# EAGLE board LoRa (EAGLE 9.6.2)
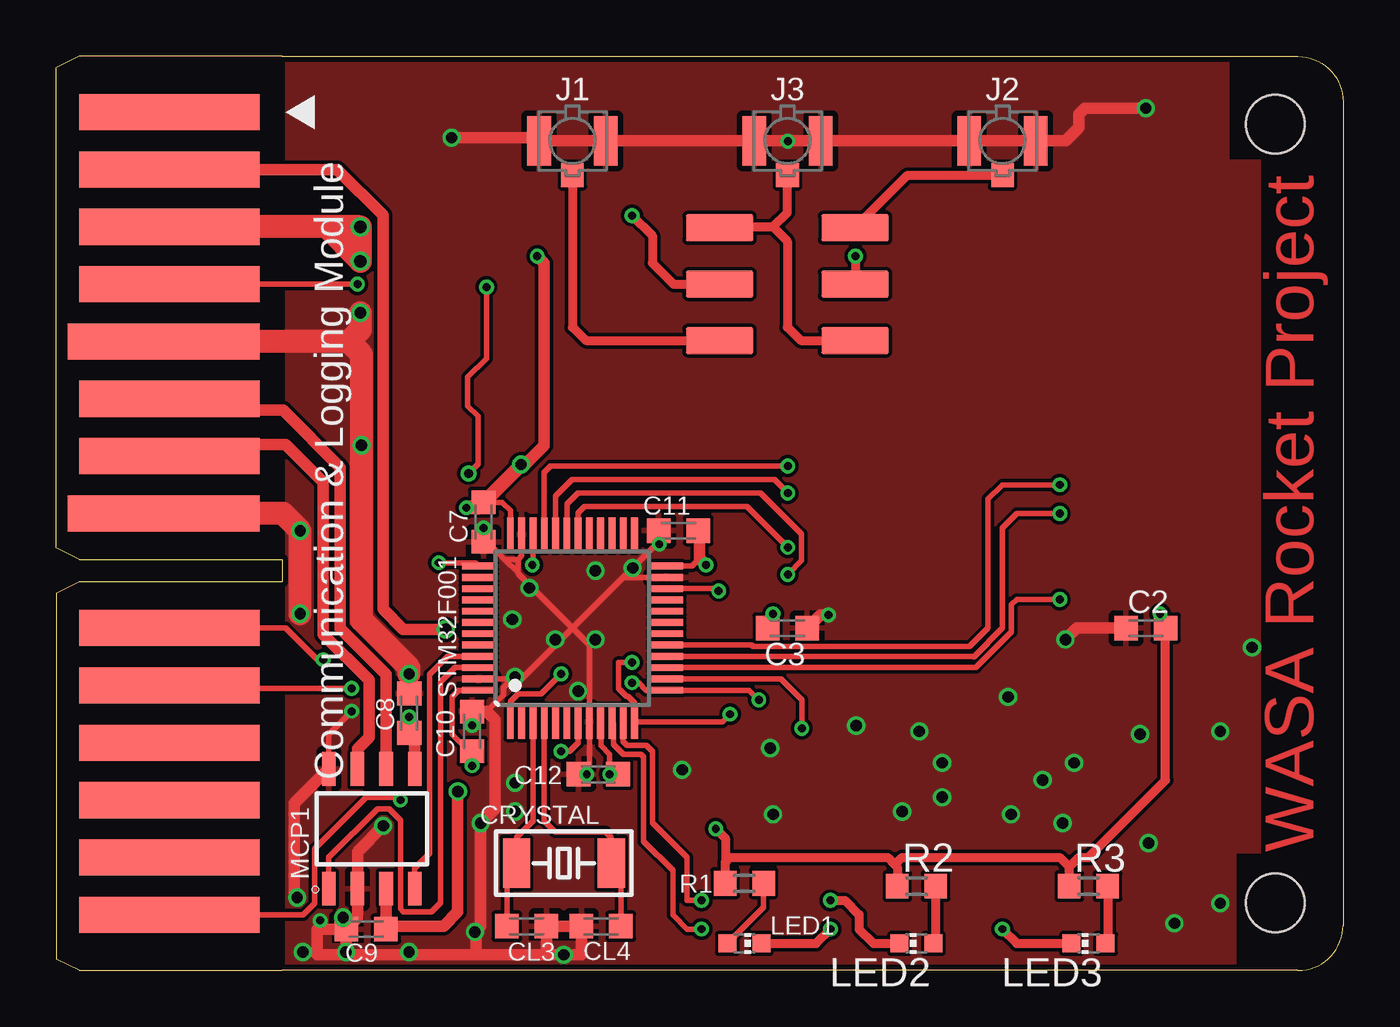
[diagram p0: board, top side]
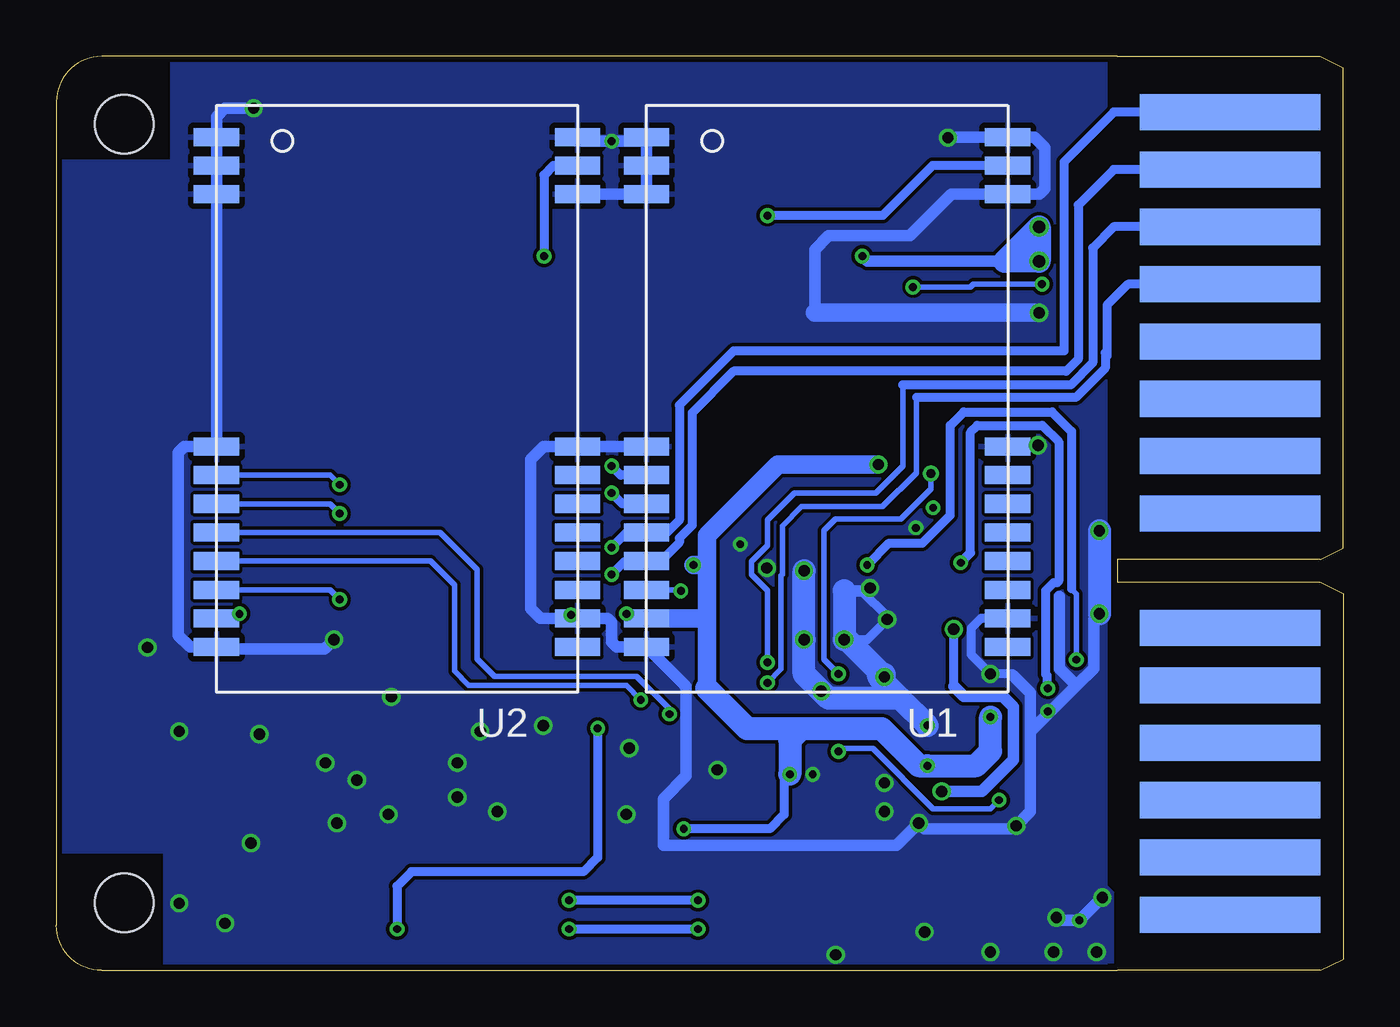
[diagram p1: board, bottom side, seen from below]

Size 57 x 40.5 mm. Coordinates in mm from the lower left corner, seen from the top.
Outline: 10,40.5 55,40.5 arc-90 57,38.5 57,2 arc-90 55,0 10,0
Copper layers (1*16): Top 0.035mm / dielectric 1.5mm / Bottom 0.035mm
Design rules "SeeedStudio_2layer_DRU_no_angle_20140221": minimum track width 6mil, minimum drill 12mil, track to track 6mil, track to pad 6mil, pad to pad 6mil, via to via 6mil, smd to smd 0mil, copper to edge 10mil, drill to drill 10mil, minimum pad ring 10mil, minimum via ring 6mil, stop-mask expansion 2mil, vias tented up to drill 100mil, thermal gap 10mil
Holes 2.6 mm at 54,3 54,37.5

## Footprints (pad centres in the part's own frame; a part is rotated, then mirrored left to right if it is on the bottom)
C0603K = smd 1.05 x 1.08: 1 -0.875,0; 2 0.875,0
FC-255 = smd 1.2 x 2.2: 1 -2.1,0; 2 2.1,0
U.FL_SMT = smd 1.05 x 2.2: GND1 -1.475,0; GND2 1.475,0 | smd 1 x 1.05: SIG 0,-1.525
CHIP-LED0603 = smd 0.8 x 0.8: A 0,-0.75; C 0,0.75
SOIC127P600X175-8N = smd 1.5 x 0.6: 1 -2.65,1.905; 2 -2.65,0.635; 3 -2.65,-0.635; 4 -2.65,-1.905; 5 2.65,-1.905; 6 2.65,-0.635; 7 2.65,0.635; 8 2.65,1.905
R0603 = smd 1 x 1.1: 1 -0.85,0; 2 0.85,0
LQFP48 = smd 1.5 x 0.3: 1 -4.15,2.75; 2 -4.15,2.25; 3 -4.15,1.75; 4 -4.15,1.25; 5 -4.15,0.75; 6 -4.15,0.25; 7 -4.15,-0.25; 8 -4.15,-0.75; 9 -4.15,-1.25; 10 -4.15,-1.75; 11 -4.15,-2.25; 12 -4.15,-2.75; 25 4.15,-2.75; 26 4.15,-2.25; 27 4.15,-1.75; 28 4.15,-1.25; 29 4.15,-0.75; 30 4.15,-0.25; 31 4.15,0.25; 32 4.15,0.75; 33 4.15,1.25; 34 4.15,1.75; 35 4.15,2.25; 36 4.15,2.75 | smd 0.3 x 1.5: 13 -2.75,-4.15; 14 -2.25,-4.15; 15 -1.75,-4.15; 16 -1.25,-4.15; 17 -0.75,-4.15; 18 -0.25,-4.15; 19 0.25,-4.15; 20 0.75,-4.15; 21 1.25,-4.15; 22 1.75,-4.15; 23 2.25,-4.15; 24 2.75,-4.15; 37 2.75,4.15; 38 2.25,4.15; 39 1.75,4.15; 40 1.25,4.15; 41 0.75,4.15; 42 0.25,4.15; 43 -0.25,4.15; 44 -0.75,4.15; 45 -1.25,4.15; 46 -1.75,4.15; 47 -2.25,4.15; 48 -2.75,4.15
E220-900T22S = smd 2 x 0.8: P1 8,-11.6; P2 8,-10.33; P3 8,-9.06; P4 8,2.11; P5 8,3.38; P6 8,4.65; P7 8,5.92; P8 8,7.19; P9 8,8.46; P10 8,9.73; P11 8,11; P12 -8,11; P13 -8,9.73; P14 -8,8.46; P15 -8,7.19; P16 -8,5.92; P17 -8,4.65; P18 -8,3.38; P19 -8,2.11; P20 -8,-9.06; P21 -8,-10.33; P22 -8,-11.6
EDGE30 = smd 1.6 x 8: 1 -17.78,-5; 2 -15.24,-5; 3 -12.7,-5; 4 -10.16,-5; 6 -5.08,-5; 7 -2.54,-5; 10 5.08,-5; 11 7.62,-5; 12 10.16,-5; 13 12.7,-5; 14 15.24,-5; 15 17.78,-5 | smd 1.6 x 8.5: 5 -7.62,-5.25; 8 0,-5.25 | smd 1.6 x 8 bottom: 16 -17.78,-5; 17 -15.24,-5; 18 -12.7,-5; 19 -10.16,-5; 20 -7.62,-5; 21 -5.08,-5; 22 -2.54,-5; 23 0,-5; 25 5.08,-5; 26 7.62,-5; 27 10.16,-5; 28 12.7,-5; 29 15.24,-5; 30 17.78,-5
IS-2245S-G = smd 1.2 x 3: 1 -2.5,3; 2 0,3; 3 2.5,3; 4 -2.5,-3; 5 0,-3; 6 2.5,-3

## Placement (x,y rotation side)
C2  0.1µF  [C0603K]  48.26,15.17 0 top
C3  0.1µF  [C0603K]  32.38,15.17 180 top
C7  [C0603K]  18.92,19.87 270 top
C8  [C0603K]  15.63,11.41 90 top
C9  [C0603K]  13.72,1.84 180 top
C10  [C0603K]  18.41,10.6 90 top
C11  [C0603K]  27.56,19.49 180 top
C12  0.1µF  [C0603K]  24,8.69 180 top
CL3  15pF  [C0603K]  20.83,1.96 180 top
CL4  15pF  [C0603K]  24.13,1.96 0 top
CRYSTAL  32.768kHz  [FC-255]  22.48,4.76 180 top
J1  U.FL-R-SMT  [U.FL_SMT]  22.86,36.76 0 top
J2  U.FL-R-SMT  [U.FL_SMT]  41.91,36.76 0 top
J3  U.FL-R-SMT  [U.FL_SMT]  32.38,36.76 0 top
LED1  [CHIP-LED0603]  30.48,1.2 270 top
LED2  [CHIP-LED0603]  38.1,1.2 90 top
LED3  [CHIP-LED0603]  45.72,1.2 90 top
MCP1  MCP2562-E/SN  [SOIC127P600X175-8N]  13.97,6.28 90 top
R1  470  [R0603]  30.48,3.87 0 top
R2  470  [R0603]  38.1,3.74 0 top
R3  470  [R0603]  45.72,3.74 0 top
STM32F001  STM32F072-LQFP48  [LQFP48]  22.86,15.17 90 top
U1  E220-900T22S  [E220-900T22S]  22.86,25.33 180 bottom
U2  E220-900T22S  [E220-900T22S]  41.91,25.33 180 bottom
U$2  EDGE30  [EDGE30]  10,20.25 270 top
U$4  IS-2245S-G  [IS-2245S-G]  32.38,30.41 90 top

## Library data of the parts
C2 C3 C7-C12 CL3 CL4 = rcl; SPICEPREFIX: C
CRYSTAL = crystal'
J1-J3 = connector; DIGIKEY: H122041-ND; MANUFACTURER: Hirose; MPN: U.FL-R-SMT-1(01)
LED1-LED3 = led
MCP1 = mcp2562-E_SN; AVAILABILITY: Unavailable; DESCRIPTION: Microchip MCP2562-E/SN, CAN Transceiver 1MBps 1-channel IEC 61000-4-2, 8-Pin SOIC; MF: Microchip; MP: MCP2562-E/SN; PACKAGE: SO-8 Microchip; PRICE: None
R1-R3 = rcl; SPICEPREFIX: R
STM32F001 = stm32f0
U1 U2 = lora
U$2 = bus
U$4 = FaBo-Switch

## Nets
CAN_RX: MCP1.4 STM32F001.45
CAN_TX: MCP1.1 STM32F001.46
CANH1: MCP1.7 U$2.7
CANL1: MCP1.6 U$2.6
GND: C2.1 C3.1 C7.2 C8.2 C9.2 C10.2 C11.2 C12.2 CL3.1 CL4.1 J1.GND1 J1.GND2 J2.GND1 J2.GND2 J3.GND1 J3.GND2 MCP1.2 MCP1.8 STM32F001.8 STM32F001.23 STM32F001.35 STM32F001.47 U1.P1 U1.P2 U1.P3 U1.P4 U1.P11 U1.P13 U1.P19 U1.P20 U1.P22 U2.P1 U2.P2 U2.P3 U2.P4 U2.P11 U2.P13 U2.P19 U2.P20 U2.P22 U$2.5 U$2.8
LORA1_AUX: STM32F001.22 U1.P9
LORA1_M0: STM32F001.33 U1.P5
LORA1_M1: STM32F001.32 U1.P6
LORA1_RTX: STM32F001.31 U1.P8 U$2.17
LORA1_TRX: STM32F001.30 U1.P7 U$2.16
LORA2_AUX: STM32F001.15 U2.P9
LORA2_M0: STM32F001.17 U2.P5
LORA2_M1: STM32F001.16 U2.P6
LORA2_RTX: STM32F001.13 U2.P8 U$2.19
LORA2_TRX: STM32F001.12 U2.P7 U$2.18
N$1: U1.P21 U$4.2
N$2: U2.P21 U$4.5
N$4: LED2.A R2.2
N$5: J1.SIG U$4.1
N$6: LED3.C STM32F001.14
N$7: J2.SIG U$4.6
N$8: J3.SIG U$4.3 U$4.4
N$9: LED3.A R3.2
N$10: LED1.C STM32F001.10
N$71: CL4.2 CRYSTAL.1 STM32F001.4
N$72: CL3.2 CRYSTAL.2 STM32F001.3
N$73: LED2.C STM32F001.11
N$76: LED1.A R1.2
NRST1: STM32F001.7 U$2.15
SWCLK1: STM32F001.37 U$2.11
SWDIO1: STM32F001.34 U$2.10
VBAT: STM32F001.1 U$2.4
VCC: C9.1 MCP1.3 U$2.2
VDD: C2.2 C3.2 C7.1 C8.1 C10.1 C11.1 C12.1 MCP1.5 R1.1 R2.1 R3.1 STM32F001.9 STM32F001.24 STM32F001.36 STM32F001.48 U1.P10 U2.P10 U$2.3
VPP: U$2.1

## Tracks (layer width: path | path; a pad name or v marks a point on that pad's centre or on a via)
CAN_RX
  Top 0.254: MCP1.4 15.88,4.52 16.54,5.18 16.54,13.13 17.33,13.92 STM32F001.45
CAN_TX
  Top 0.254: STM32F001.46 17.66,13.42 17.02,12.78 17.02,3 16.61,2.6 15.37,2.6 15.24,2.72 15.24,6.66 14.73,7.17 14.22,7.17 12.06,5.01 MCP1.1
CANH1
  Top 0.508: MCP1.7 13.34,9.82 13.84,10.33 13.84,12.87 11.81,14.9 11.81,21.65 10.16,23.3 5.51,23.3 U$2.7
CANL1
  Top 0.508: MCP1.6 14.61,13.12 12.57,15.15 12.57,22.28 10.03,24.82 5.51,24.82 U$2.6
GND  (via drill 0.35, 0.5)
  Top 0.254: STM32F001.35 20.61,18.38 20.45,18.22 | 20.45,17.63 20.45,18.22 | STM32F001.47 20.19,12.92 | 20.19,12.92 20.61,12.92 22.86,15.17 | 22.86,15.17 20.45,17.58 20.45,17.63 | 22.86,15.17 23.61,14.42 STM32F001.8 23.61,9.97 23.62,9.96 23.62,9.19 C12.2 | STM32F001.23 25.11,17.42 | 22.86,15.17 25.11,17.42 | 19.06,11.47 19.81,12.22 19.81,12.54 20.19,12.92 | C7.2 19.18,18.74 19.34,18.74 19.86,18.22 | 20.45,18.22 19.86,18.22 | 19.86,18.22 20.45,17.63 | 25.11,17.42 v25.53,17.84 26.68,18.99 C11.2 | MCP1.8 12.06,10.47 v13.08,11.49
  Top 0.508: C9.2 13.34,2.33 MCP1.2 13.34,5.26 v14.48,6.41 | 12.84,0.95 13.1,0.69 18.6,0.69 | C9.2 12.84,0.95 | v18.41,10.85 C10.2 19.06,11.47 19.43,11.11 19.43,7.17 v18.8,6.53 18.8,1.96 v18.54,1.71 18.6,1.65 18.6,0.69 | v15.62,13.14 v15.63,13.13 C8.2 | v18.92,19.61 C7.2 | C11.2 26.7,19.47 v26.7,18.89 | v22.48,0.69 23.25,0.69 CL4.1 CL3.1 21.7,0.69 v22.48,0.69 | v22.48,0.69 18.6,0.69 | C9.2 11.56,1.84 11.56,0.69 12.59,0.69 12.84,0.95 | MCP1.8 10.54,7.41 10.54,3.36 v10.67,3.23 | v44.7,14.66 45.21,15.17 C2.1 | v48.26,38.2 45.55,38.2 45.3,37.95 45.3,37.35 44.71,36.76 J2.GND2 J2.GND1 J3.GND2 | v17.51,36.9 21.25,36.9 J1.GND1 J1.GND2 J3.GND1 J3.GND2 | v32.4,36.75 v32.41,36.76 J3.GND2 | C3.1 33.84,15.75 v34.2,15.75
  Top 1.016: U$2.8 10.03,20.25 v10.79,19.49 v10.79,15.8 | 12.95,27.87 U$2.5 | v15.62,13.14 15.62,13.42 13.51,15.53 v13.51,23.27 13.51,27.31 12.95,27.87 | v13.46,29.14 13.46,28.38 12.95,27.87
  Bottom 0.406: v22.1,14.66 21.08,14.66 v20.19,15.55 20.19,15.68 21.34,16.82 | U1.P13 16.04,15.6 16.49,15.15 16.49,14 v15.62,13.14 14.67,13.14 14.64,13.11
  Bottom 0.508: 14.64,13.11 13.84,12.31 13.84,10.6 | 13.84,10.6 13.84,7.04 v14.48,6.41 14.61,6.28 18.54,6.28 v18.8,6.53 19.78,5.55 30.11,5.55 30.11,7.61 29.11,8.62 29.11,12.58 U1.P11 32.18,14.33 32.4,14.55 32.4,15.42 32.58,15.6 U2.P13 | 13.84,10.6 11.81,12.63 | 11.81,12.63 11.05,13.39 11.05,15.55 v10.79,15.8 | 20.95,16.82 21.34,16.82 22.1,16.82 | 11.81,12.63 12.57,13.39 12.57,16.57 | v12.7,2.34 12.57,2.22 v11.68,2.22 v10.67,3.23 | U1.P4 U2.P19 35.43,23.22 36,22.65 36,16.05 35.55,15.6 U2.P13 | v44.7,14.66 45.12,14.25 49.83,14.25 U2.P11 51.08,14.33 51.6,14.85 51.6,22.95 51.33,23.22 U2.P4 U2.P2 | v48.26,38.2 49.55,38.2 49.91,37.84 U2.P1 U2.P2 | v17.51,36.9 17.48,36.93 U1.P22 13.68,36.93 13.2,36.45 13.2,34.65 13.46,34.39 U1.P20 17.36,34.39 19.2,32.55 22.8,32.55 23.4,31.95 23.4,29.14 | U2.P20 U1.P3 U1.P1 | U1.P2 U1.P1 | U2.P3 U2.P2 | U1.P1 31.04,36.75 v32.4,36.75 33.73,36.75 U2.P22 | U2.P13 34.06,15.75 v34.2,15.75 | v13.51,23.27 13.56,23.22 U1.P19
  Bottom 0.813: v13.46,29.14 23.4,29.14
  Bottom 1.016: 19.62,12.06 20.57,13.01 20.57,13.14 20.32,13.14 v20.32,13.01 21.97,14.66 v22.1,14.66 22.1,16.82 | 19.62,12.06 v18.41,10.85 | v10.79,19.49 v10.79,15.8 | 19.62,12.06 22.8,12.06 v23.11,12.38 23.88,13.14 v23.88,14.66 v23.88,17.71
  other vias: 23.5,8.69 20.32,8.31 20.32,7.04 10.92,0.82 12.83,0.82 20.95,16.95 31.62,9.85 15.62,0.82 49.53,2.09 43.69,8.44 31.75,6.91 44.58,6.53 51.56,2.98 48.39,5.64 42.29,6.91 45.09,9.2 48.01,10.47 51.56,10.6 39.24,9.2 38.23,10.6 35.43,10.85 42.16,12.12 52.97,14.32 27.72,8.89 39.24,7.68 37.47,7.04
  pour Top: 19.68,17.96 19.68,13.14 26.04,13.14 26.04,17.96
  pour Top: 19.68,13.14 19.68,12.12 20.32,12.12 20.32,12.38 21.97,12.38 21.97,13.14
  pour Top: 22.86,13.14 22.73,13.14 22.73,12.5 22.73,11.99 26.04,11.99 26.04,13.14
  pour Top (no thermals): 26.42,1.33 26.42,0.31 14.86,0.31 14.86,2.09 19.43,2.09 19.43,1.33
  pour Top (no thermals): 19.94,12.12 19.81,11.99 19.81,10.22 20.95,9.07 20.95,6.79 19.68,5.52 19.68,2.98 19.3,2.6 19.3,2.09 17.91,2.09 17.91,2.22 18.03,2.34 18.03,7.8 19.05,8.82 19.05,11.99 19.18,12.12
  pour Top (no thermals): 14.99,0.31 10.16,0.31 10.16,2.22 11.94,2.22 12.19,1.96 12.19,1.2 14.99,1.2
  pour Top (no thermals): 21.21,17.58 21.21,17.84 21.72,18.34 26.04,18.34 26.04,17.71 21.34,17.71
  pour Top (no thermals): 13.84,15.8 13.84,15.93 13.84,25.2
  pour Bottom: 10.16,0.31 10.16,2.98 26.8,2.98 26.8,0.31
  pour Bottom: 13.84,0.31 10.79,0.31 10.41,0.69 10.41,1.07 10.67,1.33 13.84,1.33
  pour Bottom: 11.3,1.84 13.08,1.84 13.34,2.09 13.34,2.6 13.08,2.85 11.94,2.85 10.92,3.87 10.54,3.87 10.16,3.49 10.16,2.98
  pour Top: 10.41,2.72 10.79,2.72 11.18,3.11 11.18,5.52 12.95,7.3 12.95,9.96 13.59,10.6 13.59,11.61 12.95,12.25 10.54,12.25 10.16,11.87 10.16,2.98
  pour Top: 13.46,22.03 10.29,25.2 10.29,29.77 10.54,30.03 13.84,30.03 13.84,15.17 13.83,15.17
  pour Bottom: 10.8,40.95 51.9,40.95 51.9,35.85 57.3,35.85 57.3,35.25 57.3,5.25 52.2,5.25 52.2,-0.45 10.5,-0.45 10.5,41.25 10.8,41.25
  pour Top: 10.2,40.65 51.9,40.65 51.9,35.85 57.3,35.85 57.3,5.25 52.2,5.25 52.2,-0.15 10.2,-0.15
LORA1_AUX  (via drill 0.35)
  Top 0.254: STM32F001.22 29.24,16.92 v29.34,16.82
  Bottom 0.254: v29.34,16.82 29.39,16.87 U1.P9
LORA1_M0  (via drill 0.35)
  Top 0.254: STM32F001.33 21.61,22.06 21.9,22.35 v32.4,22.35
  Bottom 0.406: U1.P5 32,21.95 v32.4,22.35
LORA1_M1  (via drill 0.35)
  Top 0.254: v32.4,21.15 31.8,21.75 22.84,21.75 22.11,21.02 STM32F001.32
  Bottom 0.406: U1.P6 31.93,20.68 v32.4,21.15
LORA1_RTX  (via drill 0.35)
  Top 0.254: STM32F001.31 22.61,20.66 23.1,21.15 31.2,21.15 33.01,19.34 33.01,18.16 v32.4,17.55
  Bottom 0.406: U$2.17 10.16,35.49 11.73,33.92 11.73,27.08 12.26,26.55 27,26.55 28.84,24.71 28.84,19.72 29.4,19.16 29.4,18.97 30.23,18.14 U1.P8 31.81,18.14 v32.4,17.55
LORA1_TRX  (via drill 0.35)
  Top 0.254: STM32F001.30 23.11,20.26 23.4,20.55 30.6,20.55 v32.4,18.75
  Bottom 0.406: U$2.16 10.16,38.03 12.37,35.83 12.37,27.45 27,27.45 29.4,25.05 29.4,19.95 29.94,19.41 U1.P7 31.74,19.41 v32.4,18.75
LORA2_AUX  (via drill 0.35)
  Top 0.254: STM32F001.15 40.73,13.42 42.32,15 42.32,16.21 42.55,16.44 v44.45,16.44
  Bottom 0.254: v44.45,16.44 44.88,16.87 U2.P9
LORA2_M0  (via drill 0.35)
  Top 0.254: STM32F001.17 30.8,14.42 30.87,14.35 40.46,14.35 41.27,15.17 41.27,20.89 41.91,21.52 v44.45,21.52
  Bottom 0.254: v44.45,21.52 44.88,21.95 U2.P5
LORA2_M1  (via drill 0.35)
  Top 0.254: STM32F001.16 40.62,13.92 40.64,13.9 41.91,15.17 41.91,19.61 42.55,20.25 v44.45,20.25
  Bottom 0.254: v44.45,20.25 44.88,20.68 U2.P6
LORA2_RTX  (via drill 0.35)
  Top 0.254: v31.11,11.99 30.69,12.42 STM32F001.13 26.13,12.42 25.8,12.75 v25.5,12.75
  Bottom 0.254: v31.11,11.99 31.75,12.63 38.73,12.63 39.37,13.27 39.37,17.07 40.44,18.14 U2.P8 | v25.5,12.75 24.89,13.36 24.89,13.9 24.9,13.91 24.9,17.5 24.84,17.55 24.84,19.7 24,20.55 20.4,20.55 18.9,22.05 18.9,25.39
  Bottom 0.406: U$2.19 9.53,30.41 10.46,29.48 10.46,27.45 | 10.46,27.45 10.46,27.23 | 10.46,27.45 10.54,27.37 10.54,26.69 11.84,25.39 18.9,25.39
LORA2_TRX  (via drill 0.35)
  Top 0.254: v29.84,11.36 29.5,11.02 STM32F001.12 25.61,11.85 25.32,12.14 25.25,12.14 24.89,12.5 24.89,13.65 v25.5,13.65
  Bottom 0.254: U2.P7 40.01,19.41 38.36,17.77 38.36,13.81 37.59,13.04 31.3,13.04 29.84,11.58 v29.84,11.36 | v25.5,13.65 25.5,16.85 26.21,17.55 26.21,18.12 25.5,18.83 25.5,19.95 24.3,21.15 20.7,21.15 19.5,22.35 19.5,25.95
  Bottom 0.406: U$2.18 10.16,32.95 11.1,32.02 11.1,26.92 12.07,25.95 19.5,25.95
N$1  (via drill 0.35)
  Top 0.406: v25.5,33.45 26.4,32.55 26.4,31.35 27.34,30.41 U$4.2
  Bottom 0.406: U1.P21 18.19,35.66 20.4,33.45 v25.5,33.45
N$2  (via drill 0.35)
  Top 0.406: v35.4,31.65 35.4,30.43 U$4.5
  Bottom 0.406: U2.P21 34.99,35.66 35.4,35.25 v35.4,31.65
N$4
  Top 0.406: R2.2 38.95,1.3 LED2.A
N$5
  Top 0.406: J1.SIG 22.86,28.51 23.45,27.91 U$4.1
N$6  (via drill 0.35)
  Top 0.254: STM32F001.14 32.09,12.92 33.02,11.99 v33.02,10.72
  Top 0.406: v41.91,1.84 42.55,1.2 LED3.C
  Bottom 0.406: v33.02,10.72 33.02,5.01 33.66,4.38 41.27,4.38 41.91,3.74 v41.91,1.84
N$7
  Top 0.406: U$4.6 37.71,35.23 J2.SIG
N$8
  Top 0.406: U$4.3 29.43,32.95 31.75,32.95 | 31.75,32.95 32.38,33.59 J3.SIG | 31.75,32.95 32.38,32.31 32.38,28.51 32.98,27.91 U$4.4
N$9
  Top 0.406: R3.2 46.57,1.3 LED3.A
N$10  (via drill 0.35)
  Top 0.254: STM32F001.10 24.68,10.95 24.68,10.01 25.12,9.57 25.89,9.57 26.01,9.46 26.01,5.73 27.3,4.44 27.3,2.47 27.94,1.84 v28.57,1.84
  Top 0.406: LED1.C 33.66,1.2 v34.29,1.84
  Bottom 0.406: v28.57,1.84 v34.29,1.84
N$71
  Top 0.254: STM32F001.4 21.61,6.64 22.1,6.15 24.32,6.15 24.58,5.9 CRYSTAL.1 25,4.33 CL4.2
N$72
  Top 0.254: STM32F001.3 21.11,6.63 20.38,5.9 CRYSTAL.2 19.95,4.33 CL3.2
N$73  (via drill 0.35)
  Top 0.254: STM32F001.11 25.11,10.16 25.29,9.98 26.15,9.98 26.42,9.71 26.42,6.53 27.94,5.01 27.94,3.11 v28.57,3.11
  Top 0.406: v34.29,3.11 34.92,3.11 35.56,2.47 35.56,1.84 36.2,1.2 LED2.C
  Bottom 0.406: v28.57,3.11 v34.29,3.11
N$76
  Top 0.254: R1.2 31.33,2.8 LED1.A
NRST1  (via drill 0.35)
  Top 0.254: v22.35,9.71 22.73,9.71 23.11,10.09 STM32F001.7 | U$2.15 10.92,2.47 11.43,2.98 11.43,5.39 13.72,7.68 15.11,7.68 v15.24,7.55
  Bottom 0.254: v22.35,9.71 22.23,9.84 20.83,9.84 18.16,7.17 15.62,7.17 v15.24,7.55
SWCLK1  (via drill 0.35)
  Top 0.254: v13.08,12.5 5.13,12.5 U$2.11 | STM32F001.37 18.56,18.07 v16.94,18.07
  Bottom 0.254: v16.94,18.07 16.81,18.19 | 13.21,12.63 13.11,12.54 v13.08,12.5
  Bottom 0.406: v16.94,18.07 16.5,18.51 16.5,23.85 16.2,24.15 13.32,24.15 12.6,23.43 12.6,17.25 12.67,17.18 12.83,17.18 13.18,16.82 13.18,13.14 13.11,13.07 13.11,12.54
SWDIO1  (via drill 0.35)
  Top 0.254: v11.81,13.77 11.56,13.77 10.16,15.17 U$2.10 | STM32F001.34 21.11,17.99 v21.08,17.96
  Bottom 0.254: 12.03,16.92 11.81,16.69 v11.81,13.77
  Bottom 0.406: v21.08,17.96 20.11,18.93 18.64,18.93 17.4,20.17 17.4,24.15 16.8,24.75 12.9,24.75 12.03,23.88 12.03,16.92
VBAT  (via drill 0.35, 0.4)
  Top 0.254: STM32F001.1 20.11,11.91 20.45,12.25 21.46,12.25 v22.35,13.14 | v13.34,30.41 U$2.4 | v19.05,30.28 19.05,27.11 18.22,26.28 18.22,25.01 18.67,24.57 18.67,22.44 v18.25,22.03
  Bottom 0.254: v22.35,13.14 22.99,13.77 22.99,19.49 22.48,20 19.59,20 18.25,21.34 v18.25,22.03 | v19.05,30.28 16.51,30.28 16.38,30.41 v13.34,30.41
VCC  (via drill 0.5)
  Top 0.508: MCP1.3 14.61,1.85 C9.1 14.72,1.96 17.14,1.96 17.78,2.6 v17.78,7.93 | v17.25,15.12 15.36,15.12 14.47,16.01 14.47,33.47 12.45,35.49 U$2.2
  Bottom 0.406: 17.25,12.6 v17.25,15.12
  Bottom 0.508: v17.78,7.93 16,7.93 14.61,9.33 14.61,11.67 15.08,12.15 16.8,12.15 17.25,12.6 | v17.25,15.12 17.25,14.95
VDD  (via drill 0.35, 0.5, 0.55)
  Top 0.254: STM32F001.36 20.11,20.38 19.74,20.74 C7.1 | STM32F001.9 24.13,11 24.13,9.96 24.51,9.58 24.51,9.06 C12.1 | STM32F001.48 17.82,12.42 17.53,12.12 17.53,10.47 18.27,9.72 C10.1 | STM32F001.24 28.15,17.92 28.43,18.2 C11.1 | C2.2 48.9,15.41 v48.9,15.8
  Top 0.406: R1.1 29.63,4.79 | 29.63,4.79 29.84,5.01 36.83,5.01 37.15,4.69 | 37.15,4.69 37.25,4.59 R2.1 | 37.15,4.69 37.47,5.01 44.45,5.01 44.87,4.59 | R3.1 44.87,4.59 | 44.87,4.59 45.29,5.01 45.72,5.01 49.13,8.43 C2.2 | v29.21,6.28 29.63,5.86 29.63,4.79 | v31.75,15.8 31.75,15.41 C3.2
  Top 0.508: v18.41,9.07 C10.1 | C12.1 v24.51,8.69 | v15.62,11.23 v15.63,11.23 C8.1 15.88,10.28 MCP1.5 | v28.78,17.96 28.48,18.26 28.48,19.44 C11.1 | v20.59,22.42 20.77,22.42 21.6,23.25 21.6,31.35 v21.3,31.65
  Top 0.61: v20.59,22.42 20.59,22.41 C7.1 18.68,20.5 v18.16,20.5
  Top 1.016: 11.94,32.95 v13.46,32.95 v13.46,31.43 11.94,32.95 | 11.94,32.95 U$2.3
  Bottom 0.254: U2.P10 49.7,15.8 v48.9,15.8
  Bottom 0.406: v24.51,8.69 24.77,8.44 24.77,6.91 25.4,6.28 v29.21,6.28 | U1.P10 31.07,15.8 v31.75,15.8
  Bottom 0.508: v13.46,31.43 21.08,31.43 v21.3,31.65
  Bottom 0.813: v20.59,22.42 25.04,22.42 28.18,19.27 28.18,18.15 | 28.18,18.15 28.18,15.75 | 28.18,15.75 28.18,12.5 | v28.78,17.96 28.37,17.96 28.18,18.15 | U1.P10 28.33,15.6 28.18,15.75
  Bottom 1.016: v24.51,8.69 24.51,10.22 24,10.72 | 24,10.72 26.4,10.72 28.18,12.5 | 24,10.72 20.45,10.72 18.8,9.07 v18.41,9.07 16.26,9.07 15.62,9.71 v15.62,11.23 | v13.46,32.95 v13.46,31.43 14.99,31.43 v13.46,32.95

## Text on the board
Top: WASA Rocket Project
tNames: Communication & Logging Module
tStop: WASA Rocket Project
bStop: Designed by @fujiy0, 2019